# Altium PCB PCB1.PcbDoc
Units mm, origin at the board's own origin, x right, y up, seen from the top; angles counter-clockwise.
Board outline 120 x 72 mm, 2 copper layers (Top Layer, Bottom Layer); 37 components, 34 nets, 153 pads, 10 vias.
Unrouted connection lines stored in the file: 23.
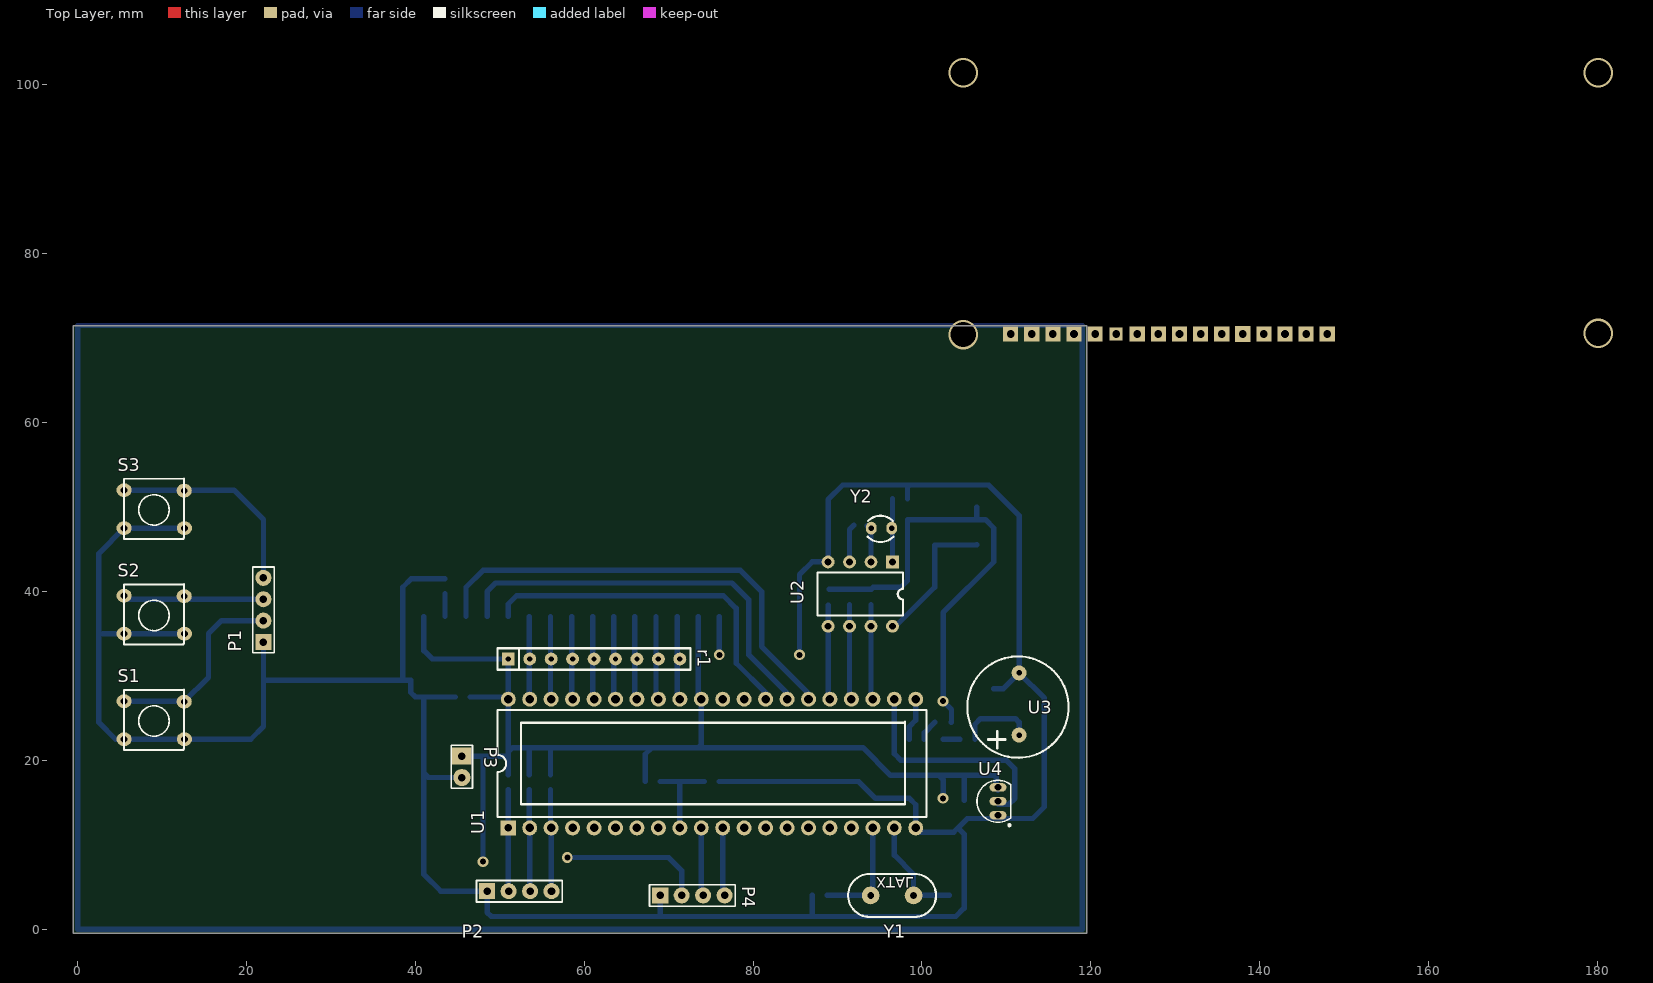
[diagram p0: Top Layer view]
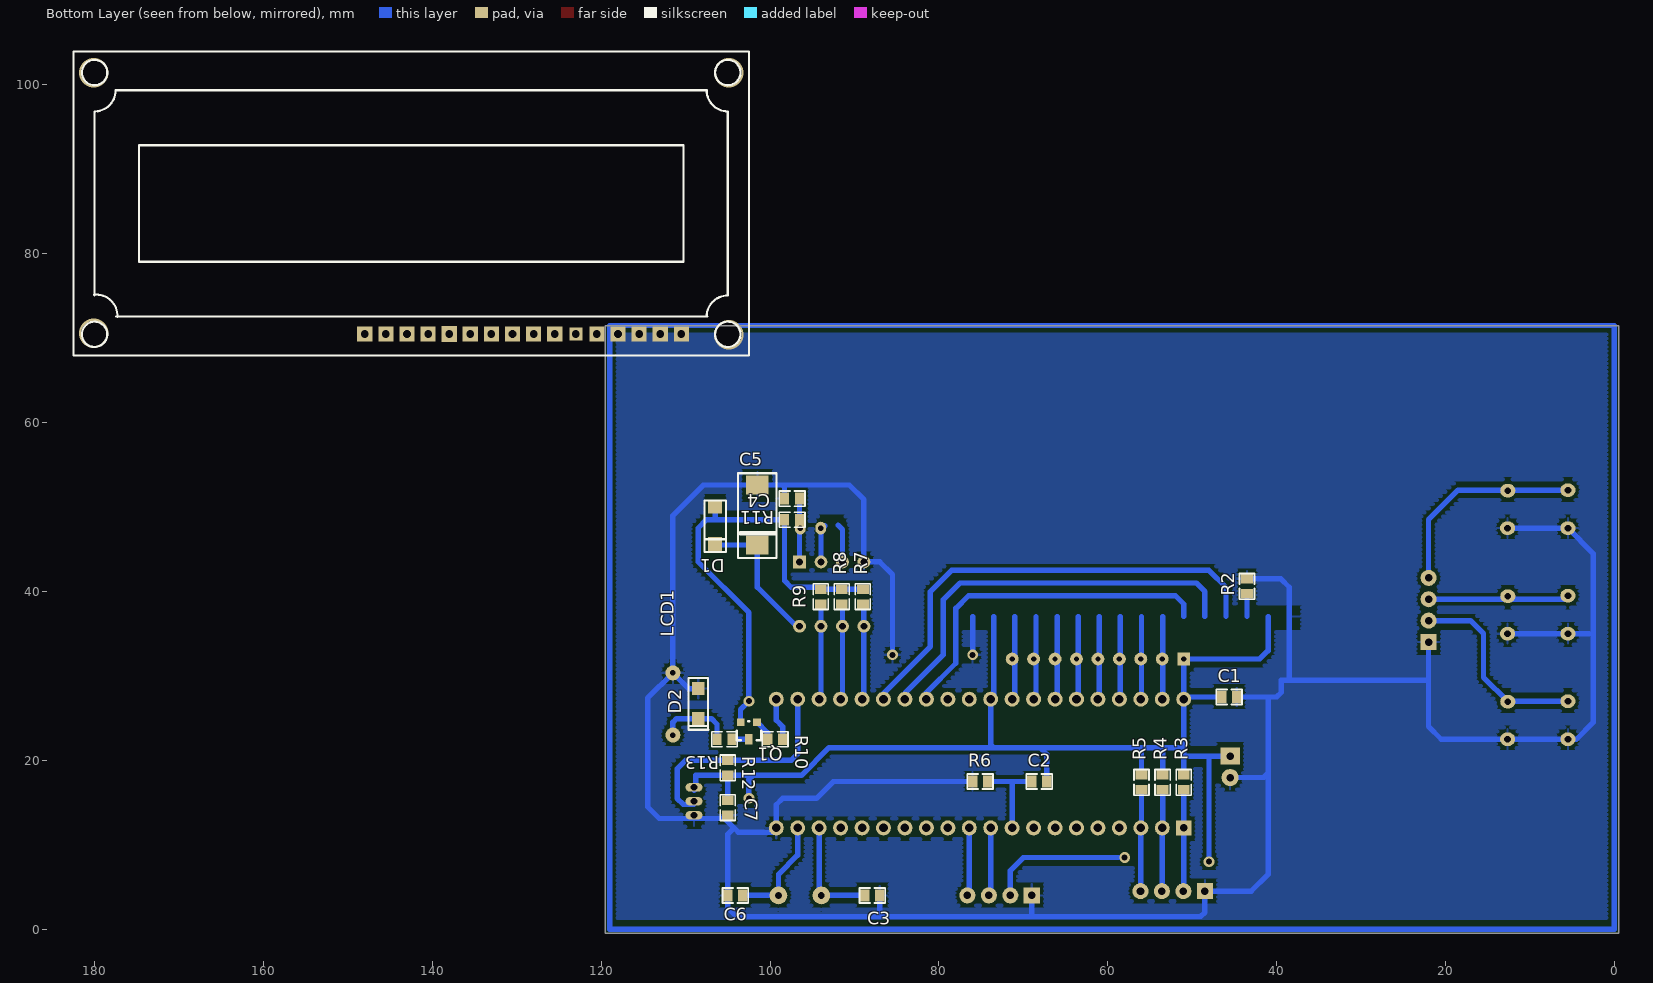
[diagram p1: Bottom Layer view, seen from below]

## Layer stack, top to bottom
Top Layer: signal copper 0.0356
Dielectric: dielectric 0.32, FR-4, Dk 4.8
Bottom Layer: signal copper 0.0356

## Board outline
-0.5,71.5 119.5,71.5 119.5,-0.5 -0.5,-0.5 -0.5,17.5 -0.5,71.5

## Design rules (kind name [scope] priority, off if disabled: settings)
Clearance [All] p1: gap=0.381
PolygonConnect [All] p1: connectstyle=Relief reliefconductorwidth=0.254 reliefentries=4 polygonreliefangle="90 Angle"
RoutingVias [All] p1: holewidth=0.711 width=1.397 viastyle="Through Hole" minholewidth=0.711 minwidth=2.032 maxholewidth=0.711 maxwidth=1.016
SilkscreenOverComponentPads [All] p1: minsilkscreentomaskgap=0.254
SolderMaskExpansion [All] p1: expansion=0.102
Width Width_1 [All] p1: maxlimit=2.54 minlimit=0.254 preferedwidth=0.508
Width [InNet('VCC')] p2: maxlimit=1.524 minlimit=0.254 preferedwidth=1.016
27 further rules are at their usual default settings.

## Components (designator, comment, footprint, x,y, rotation, side; value= is the part's Value field where it differs from the comment)
C1 "104" 0805C 46.5,27.5 r180 bottom (schematic designator C2)
C2 "104" 0805C 69,17.5 r180 bottom (schematic designator C1)
C3 "20" 0805C 87,4 r0 bottom (schematic designator C5)
C4 "104" 0805C 96.5,51 r0 bottom (schematic designator C3)
C5 "CE" 2817C+ 101.5,45.5 r90 bottom (schematic designator C4)
C6 "20" 0805C 105,4 r180 bottom
C7 "104" 0805C 105,13.5 r90 bottom
D1 "DIODE" SS14-4007 106.5,50 r270 bottom
D2 "D IN4148" 4148YZ 108.5,28.5 r270 bottom
LCD1 "1602" LCD1602 110.5,70.5 r0 bottom
P1 "CON4" SIP4 22,34 r90 top
P2 "CON4" SIP4 48.5,4.5 r0 top
P3 "CON2" SIP2 45.5,20.5 r270 top
P4 "CON4" SIP4 69,4 r0 top (schematic designator P1)
Q1 "2SC8550" SOT23 102.5,23.5 r0 bottom
r1 "10K" RPZ9 51,32 r0 top
R2 "18" 0805R 43.5,41.5 r270 bottom
R3 "10K" 0805R 51,16.5 r90 bottom
R4 "10K" 0805R 53.5,16.5 r90 bottom
R5 "10K" 0805R 56,16.5 r90 bottom
R6 "4.7K" 0805R 76,17.5 r180 bottom
R7 "RES" 0805R 89,38.5 r90 bottom (schematic designator R9)
R8 "RES" 0805R 91.5,38.5 r90 bottom (schematic designator R10)
R9 "RES" 0805R 94,38.5 r90 bottom (schematic designator R12)
R10 "RES" 0805R 98.5,22.5 r0 bottom (schematic designator R8)
R11 "100" 0805R 96.5,48.5 r0 bottom (schematic designator R7)
R12 "4.7K" 0805R 105,20 r270 bottom (schematic designator R13)
R13 "RES" 0805R 104.5,22.5 r0 bottom (schematic designator R11)
S1 "SW-PB" SW-AJ24 5.5,22.5 r0 top (schematic designator S3)
S2 "SW-PB" SW-AJ24 5.5,35 r0 top
S3 "SW-PB" SW-AJ24 5.5,47.5 r0 top (schematic designator S1)
U1 "STC89C52" DIP40 51,12 r90 top
U2 "DS1302" DIP8 96.5,43.5 r270 top
U3 "buzzer" BUZZER 111.5,23 r270 top
U4 "18B20" 18B20 109,13.5 r0 top
Y1 "12M" XTAL 99,4 r180 top
Y2 "XTAL" XTAL1-X 94,47.5 r180 top

## Footprints (in the part's own frame and the unit in brackets; to place one, negate y for a bottom-side part, rotate by r counter-clockwise, add the part's x,y. Pads: shape width x height; smd on the part's side, far side on the other; paste and mask are expansions set on the pad)
18B20 [mm]
  oval 2x1 hole 0.8: 1(0,0) 2(0,1.651) 3(0,3.302)
  silkscreen extent -2.48,-1.3 1.5,4.14, body extent -2.26,-0.82 2.01,4.38, height 10.08
0805C [mm]
  rect 1.1x1.4 smd: 1(0,0) 2(1.778,0)
  silkscreen extent -0.64,-0.89 2.41,0.89, body extent -0.11,-0.62 1.89,0.63, height 0.78
0805R [mm]
  rect 1.1x1.4 smd: 1(0,0) 2(1.778,0)
  silkscreen extent -0.64,-0.89 2.41,0.89, body extent -0.11,-0.63 1.89,0.63, height 0.55
2817C+ [mil]
  rect 90x106.3 smd: 1(0,0) 2(280,0)
  silkscreen extent -60,-90 335,90, body extent 1,-84 289,85, height 111
4148YZ [mil]
  rect 60x60 smd: 1(0,0) 2(140,0)
  silkscreen extent -50,-45 192,46, body extent 6,-30 144,30, height 80
BUZZER [mil]
  round 70 hole 25.59: 1(0,0) 2(-290,0)
  silkscreen extent -366,-241 106,231, body extent -415,-241 193,231, height 390
DIP8 [mil]
  rect 60x60 hole 31.5: 1(0,0)
  round 60 hole 31.5: 2(0,-100) 3(0,-200) 4(0,-300) 5(300,-300) 6(300,-200) 7(300,-100) 8(300,0)
  silkscreen extent 50,-350 250,50, body extent 0,-365 306,61, height 227
DIP40 [mil]
  rect 70.87x70.87 hole 35.43: 1(0,0)
  round 70 hole 40: 2(0,-100) 3(0,-200) 4(0,-300) 5(0,-400) 6(0,-500) 7(0,-600) 8(0,-700) 9(0,-800) 10(0,-900) 11(0,-1000) 12(0,-1100) 13(0,-1200) 14(0,-1300) 15(0,-1400) 16(0,-1500) 17(0,-1600) 18(0,-1700) 19(0,-1800) 20(0,-1900) 21(600,-1900) 22(600,-1800) 23(600,-1700) 24(600,-1600) 25(600,-1500) 26(600,-1400) 27(600,-1300) 28(600,-1200) 29(600,-1100) 30(600,-1000) 31(600,-900) 32(600,-800) 33(600,-700) 34(600,-600) 35(600,-500) 36(600,-400) 37(600,-300) 38(600,-200) 39(600,-100) 40(600,0)
  silkscreen extent 50,-1950 550,50, body extent 6,-1982 615,82, height 244
LCD1602 [mm] "LCD"
  rect 1.8x1.8 hole 0.9: 1(0,0) 2(2.5,0) 3(5,0) 4(7.5,0) 5(10,0) 7(15,0) 8(17.5,0) 9(20,0) 10(22.5,0) 11(25,0) 13(30,0) 14(32.5,0) 15(35,0) 16(37.5,0)
  rect 1.524x1.524 hole 0.9: 6(12.5,0)
  rect 1.8x1.9 hole 0.9: 12(27.5,0)
  silkscreen extent -8,-33.46 72,2.54
RPZ9 [mil]
  rect 60x60 hole 25: 1(0,0)
  round 60 hole 25: 2(100,0) 3(200,0) 4(300,0) 5(400,0) 6(500,0) 7(600,0) 8(700,0) 9(800,0)
  silkscreen extent -50,-50 850,50, body extent -43,-29 843,20, height 249
SIP2 [mil] "Connector; Header; 2 Position"
  rect 80x90 hole 35.43: 1(0,0)
  round 80 hole 35.43: 2(100,0)
  silkscreen extent -50,-50 150,50, body extent -50,-50 150,50, height 298
SIP4 [mm] "Connector; Hea"
  rect 1.905x1.905 hole 0.9: 1(0,0)
  round 1.905 hole 0.9: 2(2.54,0) 3(5.08,0) 4(7.62,0)
  silkscreen extent -1.27,-1.27 8.89,1.27, body extent -1.27,-1.27 8.89,1.27, height 7.58
SOT23 [mil]
  rect 36x36 smd: B(-37.5,-40) E(37.5,-40)
  rect 36x50 smd: C(0.5,40)
  silkscreen extent -58,-45 58,45, body extent -55,-51 59,59, height 47
SS14-4007 [mil] "Chip Inductor, Body 2.0x1.2mm, IPC High Density"
  rect 60x65 smd: 1(0,0)
  rect 70x65 smd: 2(175,0)
  silkscreen extent -30,-50 210,50, body extent -3,-54 181,50, height 89
SW-AJ24 [mm]
  oval 1.8x1.6 hole 0.8: 1(0,0) 1(7.143,0) 2(0,4.5) 2(7.112,4.445)
  silkscreen extent 0,-1.27 7.11,5.86, body extent -0.67,-0.96 7.59,5.54, height 4.81
XTAL [mm]
  round 2.1 hole 0.8: 1(0,0) 2(5.08,0)
  silkscreen extent -2.66,-2.54 7.74,2.54, body extent -3.05,-2.35 8.13,2.35, height 4.19
XTAL1-X [mil]
  oval 50x60 hole 25.59: 1(0,0) 2(-95,0)
  silkscreen extent -103,-58 17,65, body extent -66,-44 -20,2, height 160

## Part data
C1 C2 C3 C4 C6 C7: library part CAP
r1: library part RPZ9
R2 R3 R4 R5 R6 R11 R12: library part RES
S1 S2 S3: "Switch"
Y1: library part XTAL, "Crystal Oscillator"
Y2: "Crystal Oscillator"

## Via types
v1: diameter 1.27, hole 0.711, Top Layer to Bottom Layer, 6 vias
v2: diameter 3.5, hole 3, Top Layer to Bottom Layer, 4 vias

## Nets (pads, with @x,y where several pads share a name; then routed paths per layer and width w, separated by ;. In a path a pad name is that pad's centre, name@x,y a point inside that pad or via, vN(x,y) a via of type N, cw(c..) or ccw(c..) an arc to the next point about the centre after c; other vN are vias at no path point)
18B20: R12.1 U1.22 U4.2 | length 27.3
  Bottom Layer w0.635: U1.22 96.72,20.78 97.5,20 R12.1 110,20 111,19 111,15.5 110.27,14.77 U4.2@109,14.77
E: LCD1.6 U1.28 | length 41.7
  Bottom Layer w0.635: 51,37.04 51,38.5 52,39.5 76.461,39.5 77.961,38 78,38 78,31.5 81.48,28.02 U1.28
GND: C1.2 C3.1 C4.2 C5.2 C6.1 C7.1 D2.1 LCD1.1 LCD1.16 P1.1 P2.1 P3.2 P4.1 R2.1 R6.1 S1.1 S2.1 S3.1 U1.20 U2.4 U3.2 U4.1 | length 356.6
  Bottom Layer w0.635: 3,35 5.5,35 S2.1@12.643,35 ; S3.1@12.643,47.5 5.5,47.5 2.5,44.5 2.5,24.5 4.5,22.5 5.5,22.5 12.643,22.5 20.5,22.5 22,24 22,29.5 ; P1.1 22,29.5 ; R2.1 39.5,41.5 38.5,40.5 38.5,37.04 38.5,29.5 ; C1.2 41,27.5 ; P3.2 41.54,17.96 41,18.5 ; P4.1 69,1.5 ; R6.1 92.5,17.5 94.5,15.5 98.5,15.5 99.26,14.74 U1.20 99.76,11.5 103.762,11.5 104.262,12 ; v1(76,32.5) 76,37.04 ; v1(85.5,32.5) 85.5,42 87,43.5 U2.4 88.88,50.88 90.612,52.612 98.5,52.612 ; C3.1 87,1.5 ; C4.2 98.278,52.39 98.5,52.612 ; D2.1 109.634,28.5 U3.2 ; 22,29.5 38.5,29.5 ; 38.5,29.5 39.449,29.5 39.449,28.051 40,27.5 41,27.5 ; 41,18.5 41,27.5 ; 41,18.5 41,6.5 43,4.5 P2.1 48.5,2 49,1.5 69,1.5 ; 69,1.5 87,1.5 ; 87,1.5 104,1.5 105,2.5 C6.1 105,11.262 104.262,12 ; 98.5,52.612 C5.2 107.888,52.612 111.5,49 U3.2 ; 104.262,12 105.381,13.119 109,13.119 113.119,13.119 114.5,14.5 114.5,27.366 U3.2
  other v2: 104.903,70.432
NetC2_1: C2.1 R6.2 U1.9 | length 10.8
  Bottom Layer w0.635: C2.1 71.5,17.5 ; U1.9 71.32,17.32 71.5,17.5 ; R6.2 71.5,17.5
NetC3_2: C3.2 U1.18 Y1.2 | length 13.2
  Bottom Layer w0.635: C3.2 Y1.2 94.18,4.26 U1.18
NetC4_1: C4.1 R11.1 U2.1 | length 7
  Bottom Layer w0.635: U2.1 R11.1@96.5,48 ; R11.1 C4.1
NetC5_1: C5.1 D1.2 U2.8 | length 16.9
  Bottom Layer w0.635: U2.8 96.88,35.88 101.5,40.5 C5.1 106.445,45.5 D1.2
NetC6_2: C6.2 U1.19 Y1.1 | length 13.2
  Bottom Layer w0.635: U1.19 96.72,8.78 99,6.5 Y1.1 C6.2
NetD2_2: D2.2 R13.2 U3.1 | length 9
  Bottom Layer w0.635: R13.2 106.278,24.278 106.944,24.944 D2.2 111.056,24.944 111.5,24.5 U3.1
NetLCD1_3: LCD1.3 R2.2 | length 2.7
  Bottom Layer w0.635: 43.5,37.04 R2.2
NetLCD1_7: LCD1.7 r1.2 U1.39 | length 9.8
  Bottom Layer w0.635: 53.5,37.04 53.5,27.28 U1.39
NetLCD1_8: LCD1.8 r1.3 U1.38 | length 9.8
  Bottom Layer w0.635: 56,37.04 56,27.32 U1.38
NetLCD1_9: LCD1.9 r1.4 U1.37 | length 9.8
  Bottom Layer w0.635: 58.5,37.04 58.5,27.36 U1.37
NetLCD1_10: LCD1.10 r1.5 U1.36 | length 9.9
  Bottom Layer w0.635: 61,37.04 61,27.4 U1.36
NetLCD1_11: LCD1.11 r1.6 U1.35 | length 9.9
  Bottom Layer w0.635: 63.5,37.04 63.5,27.44 U1.35
NetLCD1_12: LCD1.12 r1.7 U1.34 | length 9.9
  Bottom Layer w0.635: 66,37.04 66,27.48 U1.34
NetLCD1_13: LCD1.13 r1.8 U1.33 | length 9.9
  Bottom Layer w0.635: 68.5,37.04 68.5,27.52 U1.33
NetLCD1_14: LCD1.14 r1.9 U1.32 | length 9.9
  Bottom Layer w0.635: 71,37.04 71,27.56 U1.32
NetP4_3: P4.3 U1.10 | length 8
  Bottom Layer w0.635: P4.3@73.86,4.02 U1.10
NetP4_4: P4.4 U1.11 | length 8
  Bottom Layer w0.635: U1.11 76.4,4.02 P4.4@76.42,4
NetQ1_B: Q1.B R10.2 | length 2.5
  Bottom Layer w0.635: R10.2 100.278,23.247 Q1.B
NetQ1_C: Q1.C R13.1 | length 2
  Bottom Layer w0.635: Q1.C 104.484,22.484 R13.1
NetU2_2: U2.2 Y2.2 | length 4.5
  Bottom Layer w0.635: 93.492,47.779 93.96,47.311 U2.2
NetU2_3: U2.3 Y2.1 | length 4.6
  Bottom Layer w0.635: U2.3 91.42,47.333 91.943,47.856
R/W: LCD1.5 U1.27 | length 48.8
  Bottom Layer w0.635: 48.5,37.04 48.5,40 49.5,41 77.5,41 79.5,39 79.5,32.5 84.02,27.98 U1.27
RS: LCD1.4 U1.26 | length 55.4
  Bottom Layer w0.635: 46,37.04 46,40.5 48,42.5 78.5,42.5 81,40 81,33.5 86.56,27.94 U1.26
S0: P1.4 P2.4 R5.1 S3.2 U1.3 | length 36.9
  Bottom Layer w0.635: S3.2@5.5,52 18.5,52 22,48.5 P1.4 ; R5.1 56,12.08 U1.3 56.08,4.54 P2.4
S1: P1.3 P2.3 R4.1 S2.2 U1.2 | length 28.7
  Bottom Layer w0.635: S2.2@5.5,39.5 5.92,39.08 P1.3 ; R4.1 53.5,12.04 U1.2 53.54,4.54 P2.3
S2: P1.2 P2.2 R3.1 S1.2 U1.1 | length 35.5
  Bottom Layer w0.635: S1.2@5.5,27 S1.2@12.557,27 ; S1.2@12.612,26.945 15.5,29.833 15.5,35 17.04,36.54 P1.2 ; R3.1 U1.1 51,4.5 P2.2
S1320: R9.1 U1.23 U2.7 | length 11.3
  Bottom Layer w0.635: R9.1@93.96,38.46 U2.7 93.96,27.46 U1.23
SCLK: R7.1 U1.25 U2.5 | length 11.1
  Bottom Layer w0.635: U2.5@88.76,36 U2.5 ; U1.25@88.88,27.46 U2.5 ; R7.1@88.88,38.38 U2.5
SIO: R8.1 U1.24 U2.6 | length 11.3
  Bottom Layer w0.635: R8.1@91.42,38.42 U2.6 91.42,27.46 U1.24
SP: R10.1 U1.21 | length 5.1
  Bottom Layer w0.635: R10.1 98.5,24 99.26,24.76 U1.21
VCC: C1.1 C2.2 C7.2 D1.1 LCD1.2 LCD1.15 P3.1 P4.2 Q1.E r1.1 R3.2 R4.2 R5.2 R7.2 R8.2 R9.2 R11.2 R12.2 U1.31 U1.40 U4.3 | length 216.6
  Bottom Layer w0.635: 41,37.04 41,33 42,32 r1.1 U1.40 ; P3.1 48,20.5 ; C1.1 50.74,27.5 U1.40 ; v1(48,8) 48,20.5 ; R3.2 51,20.5 ; R4.2 53.5,21.5 ; R5.2 56,21.5 ; v1(58,8.5) 70,8.5 71.54,6.96 P4.2 ; C2.2 67.222,20.722 68,21.5 ; 73.5,37.04 73.5,27.6 U1.31 73.86,21.86 73.5,21.5 ; R7.2 R8.2 R9.2 94.222,40.5 97.5,40.5 98.278,41.278 R11.2 106.5,48.5 ; v1(102.5,15.5) 102.5,17.722 102,18.222 ; Q1.E 103.5,24.564 103.5,26 v1(102.5,27) 102.5,37.5 108.5,43.5 108.5,47.5 107.5,48.5 106.5,48.5 ; C7.2 R12.2 ; D1.1 106.5,48.5 ; U4.3@109,16.421 108.778,16.643 108.778,18.222 R12.2 ; 48,20.5 51,20.5 ; 51,20.5 51,21 ; 51,21 U1.40 ; 51,21 51.5,21.5 53.5,21.5 ; 53.5,21.5 56,21.5 ; 56,21.5 68,21.5 ; 68,21.5 73.5,21.5 ; 73.5,21.5 93,21.5 96.278,18.222 102,18.222 ; 102,18.222 R12.2
pads on no net: U1.4 U1.5 U1.6 U1.7 U1.8 U1.12 U1.13 U1.14 U1.15 U1.16 U1.17 U1.29 U1.30
copper on no net: | length 381
  Bottom Layer w0.635: 0,0 0,71.5 119,71.5 119,0 0,0
  other v2: 180.087,70.559 104.903,101.42 180.087,101.42

## Polygon pours and split planes (outlines as drawn)
GND on Bottom Layer "Bottom Layer-No Net" (hatched Horizontal grid 0.49 track 0.5, remove dead copper, pour order 2): 0.5,71.5 118.5,71.5 118.5,0 118.5,0.5 0.5,0.5 0.5,71.5

## Text inside footprints (layer, text, board x,y; h text height)
Y1: Top Overlay "XTAL" at 94.555,6.159 h1.27 r180